# EAGLE board sockets (EAGLE 6.4)
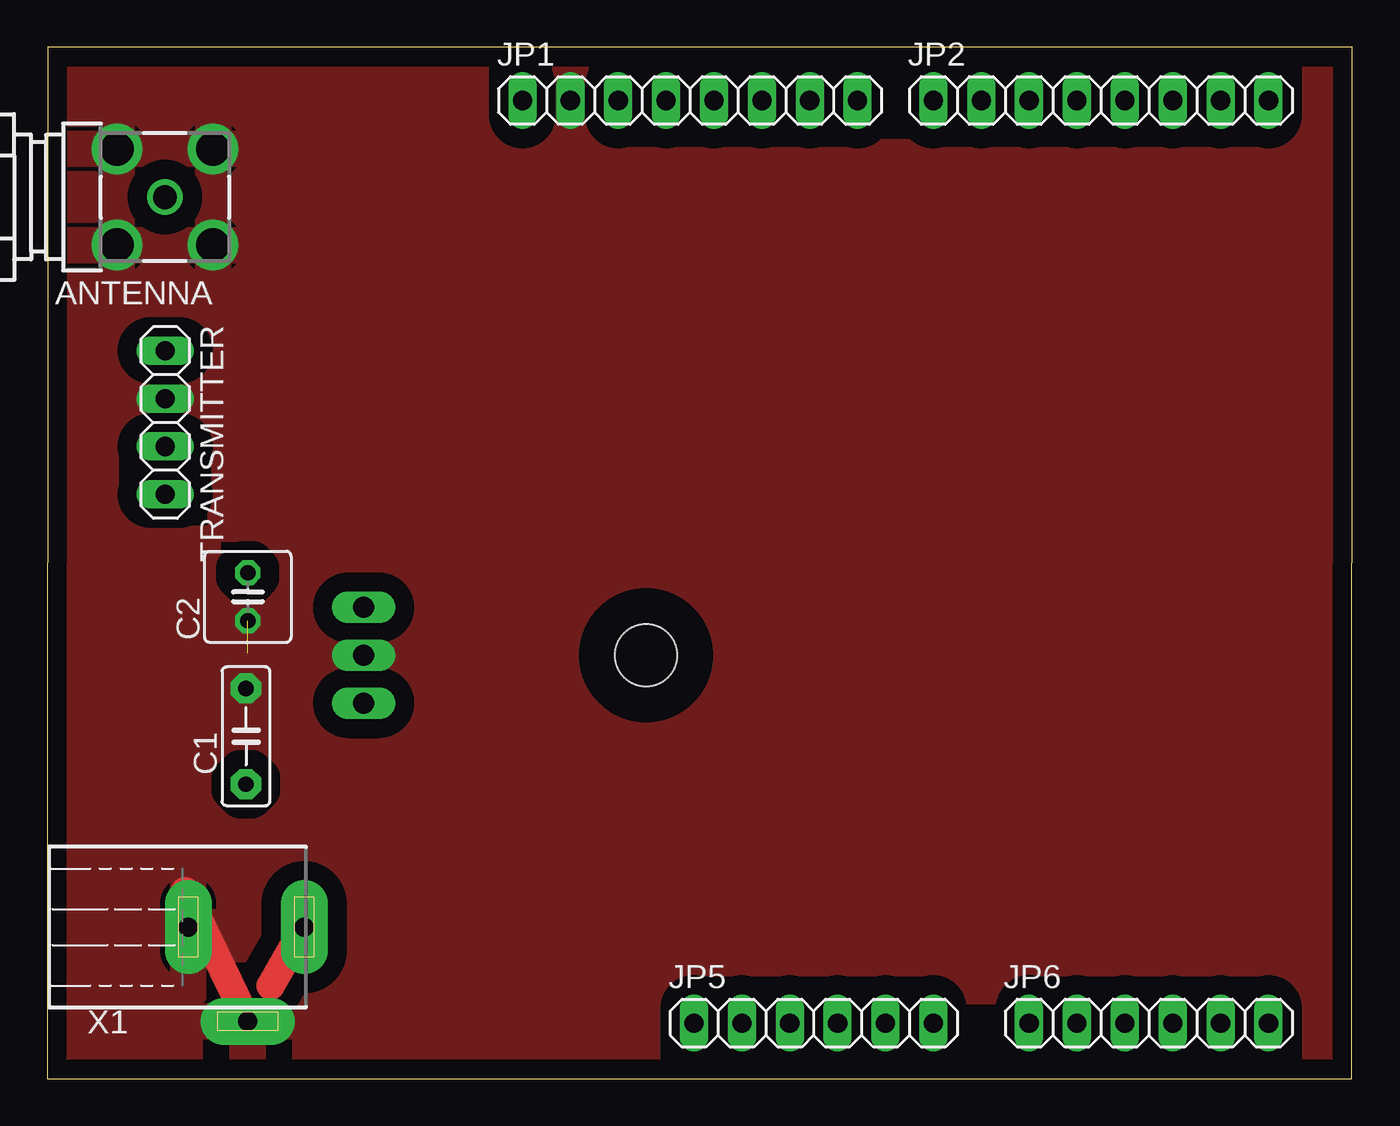
[diagram p0: board, top side]
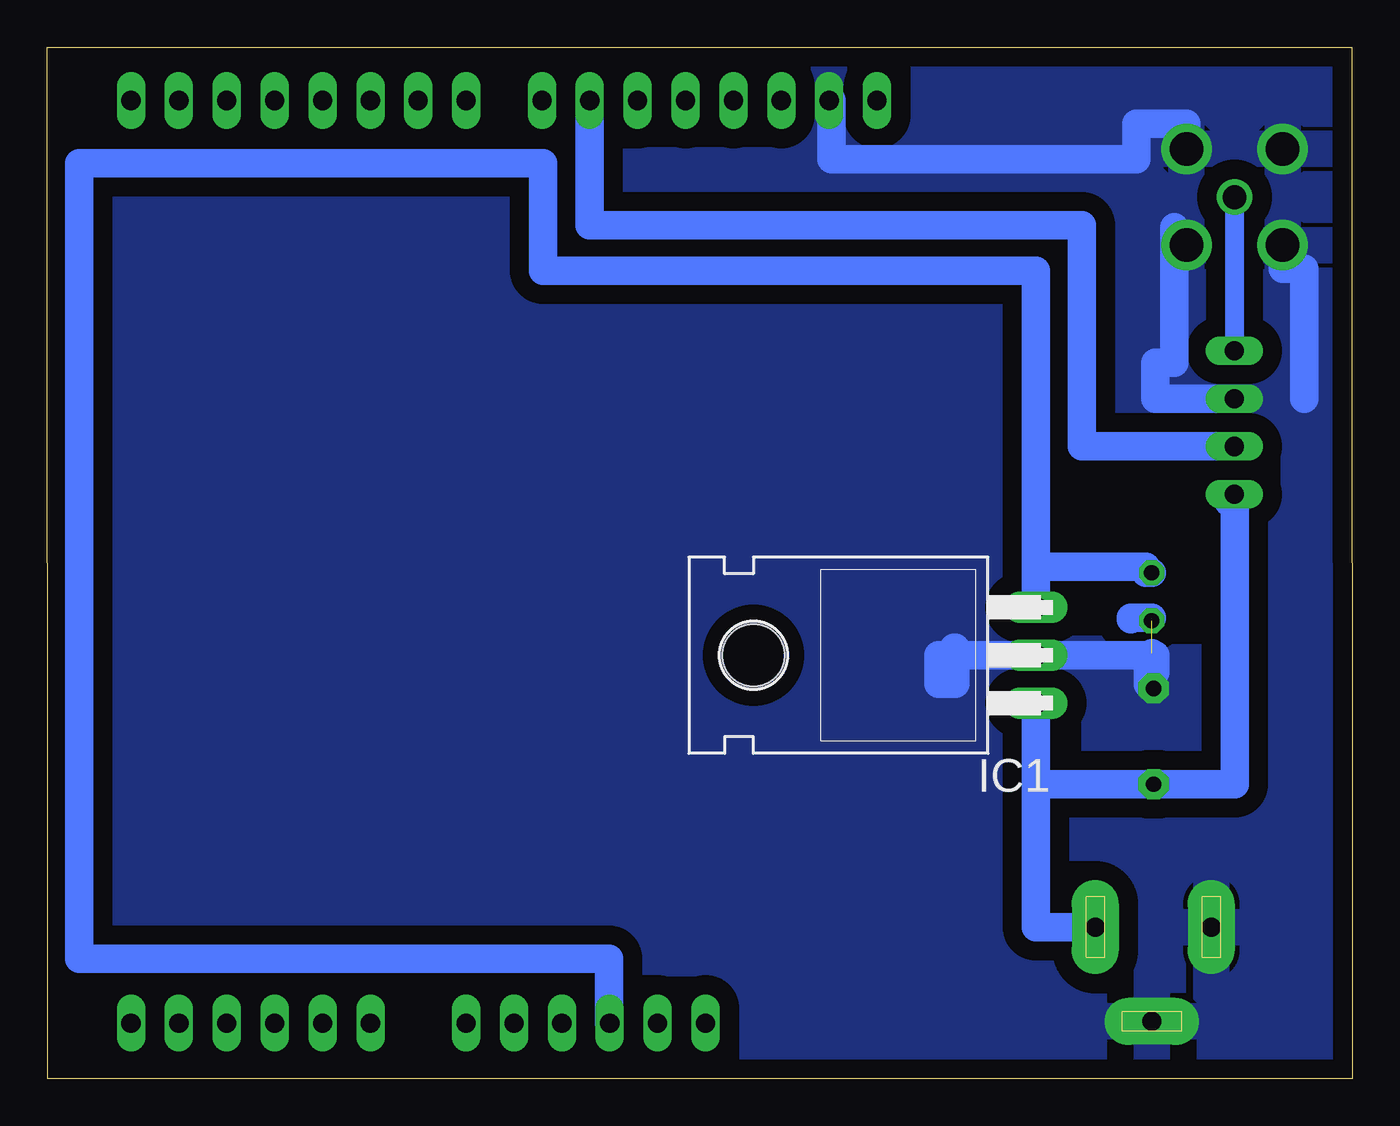
[diagram p1: board, bottom side, seen from below]

Size 69.25 x 54.7 mm. Coordinates in mm from the lower left corner, seen from the top.
Outline: 0,0 69.22,0 69.25,54.7 0.03,54.7 0,0
Copper layers (1*16): Top 0.035mm / dielectric 1.5mm / Bottom 0.035mm
Design rules "default": minimum track width 10mil, minimum drill 24mil, track to track 8mil, track to pad 8mil, pad to pad 8mil, via to via 8mil, smd to smd 8mil, copper to edge 40mil, drill to drill 8mil, minimum pad ring 10mil, minimum via ring 8mil, stop-mask expansion 4mil, vias tented up to drill 0mil, thermal gap 10mil

## Footprints (pad centres in the part's own frame; a part is rotated, then mirrored left to right if it is on the bottom)
BU-SMA-G = drill 1.27: 1 0,0 | drill 1.778: 2 -2.55,2.55; 3 2.55,2.55; 4 2.55,-2.55; 5 -2.55,-2.55
C5B2.5 = drill 0.813 pad 1.6 octagon: 1 -2.54,0; 2 2.54,0
C025-050X050 = drill 0.813 octagon: 1 -1.27,0; 2 1.27,0
TO220H = drill 1.118 long: 1 -2.54,-10.16; 2 0,-10.16; 3 2.54,-10.16 | hole 3.302: 0,4.826
1X08 = drill 1.016 long: 1 -8.89,0; 2 -6.35,0; 3 -3.81,0; 4 -1.27,0; 5 1.27,0; 6 3.81,0; 7 6.35,0; 8 8.89,0
1X06 = drill 1.016 long: 1 -6.35,0; 2 -3.81,0; 3 -1.27,0; 4 1.27,0; 5 3.81,0; 6 6.35,0
1X04 = drill 1.016 long: 1 -3.81,0; 2 -1.27,0; 3 1.27,0; 4 3.81,0
733980-62 = drill 1 pad 2.5 long: 1 0,8.57; 2 0,2.42; 3 5,5.57

## Placement (x,y rotation side)
ANTENNA  BU-SMA-G  [BU-SMA-G]  6.25,46.75 180 top
C1  330n  [C5B2.5]  10.55,18.15 90 top
C2  100n  [C025-050X050]  10.65,25.55 90 top
IC1  7805T  [TO220H]  26.95,22.45 90 bottom
JP1  [1X08]  34.11,51.87 0 top
JP2  [1X08]  55.91,51.87 0 top
JP5  [1X06]  40.67,2.94 0 top
JP6  [1X06]  58.45,2.94 0 top
TRANSMITTER  [1X04]  6.27,34.79 270 top
X1  [733980-62]  5.07,8.03 270 top

## Library data of the parts
ANTENNA = con-coax; OC_FARNELL: unknown; OC_NEWARK: unknown
C1 = capacitor-wima
C2 = rcl
IC1 = linear
JP1 JP2 JP5 JP6 TRANSMITTER = pinhead
X1 = con-conrad

## Nets
GND: ANTENNA.2 ANTENNA.3 ANTENNA.4 ANTENNA.5 C1.2 C2.1 IC1.2 JP1.2 TRANSMITTER.2 X1.2 X1.3
N$4: C2.2 IC1.3 JP5.3
N$6: C1.1 IC1.1 TRANSMITTER.4 X1.1
N$7: JP1.7 TRANSMITTER.3
N$8: ANTENNA.1 TRANSMITTER.1

## Tracks (layer width: path | path; a pad name or v marks a point on that pad's centre or on a via)
GND  (1 unrouted)
  Top 1.5: X1.3 7.33,9.93
  Bottom 1.5: JP1.2 27.65,51.87 27.65,48.75 11.45,48.75 11.45,50.65 8.8,50.65 ANTENNA.5 | 2.55,36.06 2.55,42.95 3.7,42.95 | 10.75,22.45 IC1.2 21.05,22.45 | 10.75,22.45 10.45,22.45 10.45,21.55 10.65,21.55 10.65,22.55 | 10.85,22.35 10.85,20.92 C1.2 10.75,20.92 10.75,22.45 | 21.05,22.45 21.95,22.45 21.95,20.95 21.05,20.95 21.05,22.15 21.15,22.15 21.15,22.85 21.05,22.85 21.05,22.45 | TRANSMITTER.2 10.45,36.06 10.45,37.95 9.45,37.95 9.45,45.15
  pour Bottom (isolate 1.016): 0.15,54.75 69.15,54.75 69.15,-0.15 0.15,-0.15
  pour Top (isolate 1.016): 69.15,54.85 69.15,0.05 0.15,0.05 0.15,23.45 0.65,39.05 0.65,39.25 0.05,39.25 0.05,55.55
N$4
  Bottom 1.5: JP5.3 39.45,2.94 39.45,6.35 67.55,6.35 67.55,48.55 42.95,48.55 42.95,42.85 16.79,42.85 16.79,27.15 | C2.2 10.95,26.82 10.95,27.15 16.79,27.15 | 16.79,27.15 IC1.3
N$6
  Top 1.5: X1.1 11.85,4.93
  Bottom 1.5: 16.79,18.38 IC1.1 16.79,15.85 16.79,15.61 | TRANSMITTER.4 6.55,30.98 6.55,30.55 6.25,30.55 6.25,15.61 C1.1 16.79,15.61 | 16.79,15.61 16.79,8.03 X1.1
N$7
  Bottom 1.5: TRANSMITTER.3 14.35,33.52 14.35,45.25 40.46,45.25 JP1.7
N$8
  Bottom 1: TRANSMITTER.1 6.25,38.6 ANTENNA.1
N$9
  Bottom 1.5: 10.65,24.45 11.75,24.45 11.75,24.35